# EAGLE board ledRing (EAGLE 5.12)
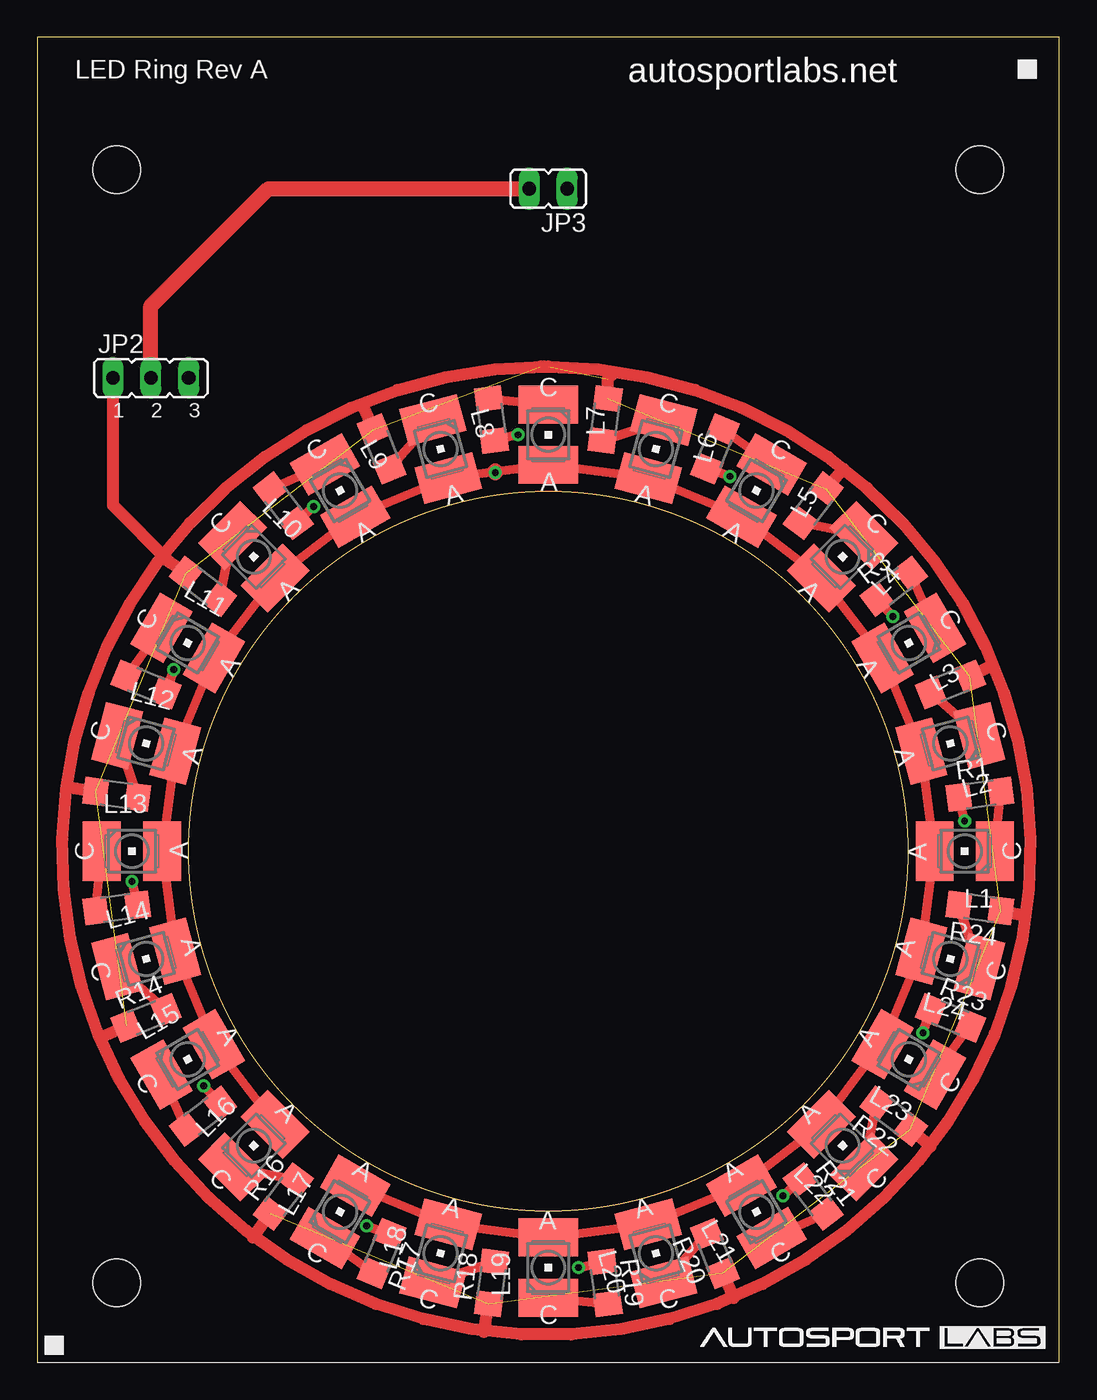
[diagram p0: board, top side]
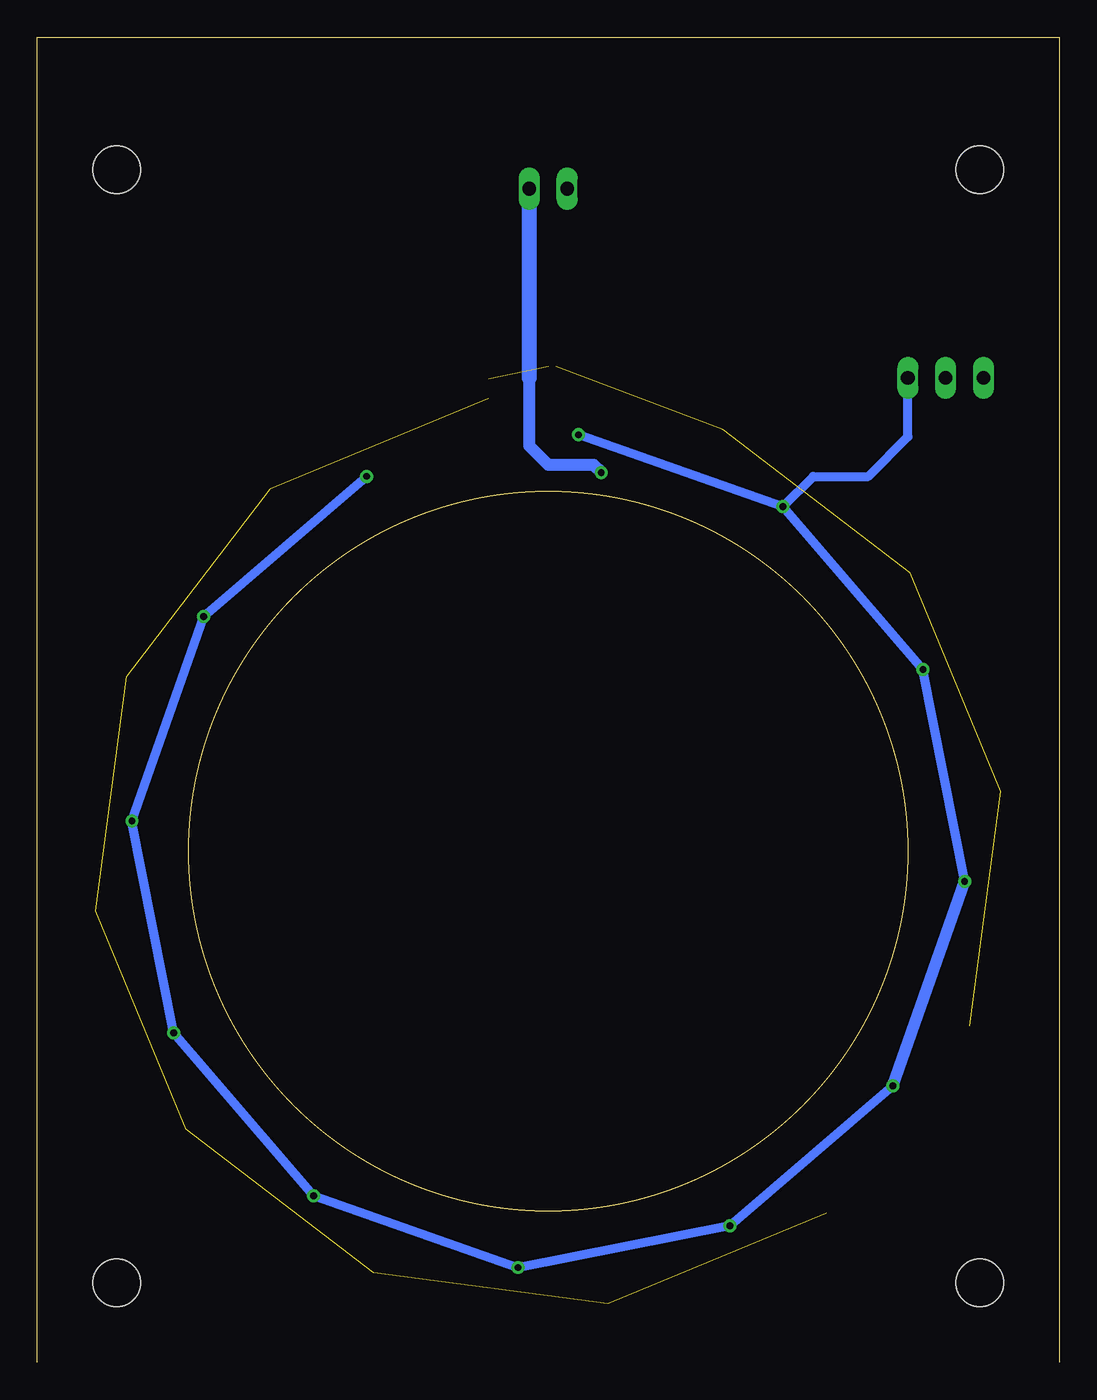
[diagram p1: board, bottom side, seen from below]

Size 68.58 x 88.9 mm. Coordinates in mm from the lower left corner, seen from the top.
Outline: 68.58,0 68.58,88.9 0,88.9 0,0
Outline: circle at 34.29,34.29 radius 24.13
Copper layers (1*16): Top 0.035mm / dielectric 1.5mm / Bottom 0.035mm
Design rules "default *": minimum track width 10mil, minimum drill 16mil, track to track 8mil, track to pad 8mil, pad to pad 8mil, via to via 8mil, smd to smd 8mil, copper to edge 20mil, drill to drill 8mil, minimum pad ring 10mil, minimum via ring 8mil, stop-mask expansion 4mil, vias tented up to drill 24mil, thermal gap 10mil
Holes 3.2 mm at 5.33,5.33 5.33,80.01 63.25,80.01 63.25,5.33

## Footprints (pad centres in the part's own frame; a part is rotated, then mirrored left to right if it is on the bottom)
JP2 = drill 0.914 long: 1 -2.54,0; 2 0,0; 3 2.54,0
JP1 = drill 0.914 long: 1 0,-1.27; 2 0,1.27
P-LCC2-COMPACT = smd 4 x 2.54: A 0,2.02; C 0,-2.02
R1206 = smd 1.6 x 1.803: 1 -1.422,0; 2 1.422,0

## Placement (x,y rotation side)
JP2  [JP2]  7.62,66.04 0 top
JP3  [JP1]  34.29,78.74 90 top
L1  LEDCOMPACT  [P-LCC2-COMPACT]  62.23,34.29 90 top
L2  LEDCOMPACT  [P-LCC2-COMPACT]  61.28,41.52 105 top
L3  LEDCOMPACT  [P-LCC2-COMPACT]  58.49,48.26 120 top
L4  LEDCOMPACT  [P-LCC2-COMPACT]  54.05,54.05 135 top
L5  LEDCOMPACT  [P-LCC2-COMPACT]  48.26,58.49 150 top
L6  LEDCOMPACT  [P-LCC2-COMPACT]  41.52,61.28 165 top
L7  LEDCOMPACT  [P-LCC2-COMPACT]  34.29,62.23 180 top
L8  LEDCOMPACT  [P-LCC2-COMPACT]  27.06,61.28 195 top
L9  LEDCOMPACT  [P-LCC2-COMPACT]  20.32,58.49 210 top
L10  LEDCOMPACT  [P-LCC2-COMPACT]  14.53,54.05 225 top
L11  LEDCOMPACT  [P-LCC2-COMPACT]  10.09,48.26 240 top
L12  LEDCOMPACT  [P-LCC2-COMPACT]  7.3,41.52 255 top
L13  LEDCOMPACT  [P-LCC2-COMPACT]  6.35,34.29 270 top
L14  LEDCOMPACT  [P-LCC2-COMPACT]  7.3,27.06 285 top
L15  LEDCOMPACT  [P-LCC2-COMPACT]  10.09,20.32 300 top
L16  LEDCOMPACT  [P-LCC2-COMPACT]  14.53,14.53 315 top
L17  LEDCOMPACT  [P-LCC2-COMPACT]  20.32,10.09 330 top
L18  LEDCOMPACT  [P-LCC2-COMPACT]  27.06,7.3 345 top
L19  LEDCOMPACT  [P-LCC2-COMPACT]  34.29,6.35 0 top
L20  LEDCOMPACT  [P-LCC2-COMPACT]  41.52,7.3 15 top
L21  LEDCOMPACT  [P-LCC2-COMPACT]  48.26,10.09 30 top
L22  LEDCOMPACT  [P-LCC2-COMPACT]  54.05,14.53 45 top
L23  LEDCOMPACT  [P-LCC2-COMPACT]  58.49,20.32 60 top
L24  LEDCOMPACT  [P-LCC2-COMPACT]  61.28,27.06 75 top
R1  100  [R1206]  63.25,38.1 7.5 top
R2  100  [R1206]  61.28,45.47 202.5 top
R3  100  [R1206]  57.47,52.07 37.5 top
R4  100  [R1206]  52.07,57.47 232.5 top
R5  100  [R1206]  45.47,61.28 67.5 top
R6  100  [R1206]  38.1,63.25 262.5 top
R7  100  [R1206]  30.48,63.25 97.5 top
R8  100  [R1206]  23.11,61.28 292.5 top
R9  100  [R1206]  16.51,57.47 127.5 top
R10  100  [R1206]  11.12,52.07 322.5 top
R11  100  [R1206]  7.3,45.47 157.5 top
R12  100  [R1206]  5.33,38.1 352.5 top
R13  100  [R1206]  5.33,30.48 187.5 top
R14  100  [R1206]  7.3,23.11 22.5 top
R15  100  [R1206]  11.12,16.51 217.5 top
R16  100  [R1206]  16.51,11.12 52.5 top
R17  100  [R1206]  23.11,7.3 247.5 top
R18  100  [R1206]  30.48,5.33 82.5 top
R19  100  [R1206]  38.1,5.33 277.5 top
R20  100  [R1206]  45.47,7.3 112.5 top
R21  100  [R1206]  52.07,11.12 307.5 top
R22  100  [R1206]  57.47,16.51 142.5 top
R23  100  [R1206]  61.28,23.11 337.5 top
R24  100  [R1206]  63.25,30.48 172.5 top

## Library data of the parts
JP2 JP3 = jumper
L1-L24 = LEDs
R1-R24 = rcl

## Nets
+12V: JP3.1 L1.A L2.A L3.A L4.A L5.A L6.A L7.A L8.A L9.A L10.A L11.A L12.A L13.A L14.A L15.A L16.A L17.A L18.A L19.A L20.A L21.A L22.A L23.A L24.A
GND: JP2.2 JP3.2
GREEN: JP2.1 R2.1 R4.1 R6.1 R8.1 R10.1 R12.1 R14.1 R16.1 R18.1 R20.1 R22.1 R24.1
N$1: L1.C R1.2
N$2: L2.C R2.2
N$3: L3.C R3.2
N$4: L4.C R4.2
N$5: L5.C R5.2
N$6: L6.C R6.2
N$7: L7.C R7.2
N$8: L8.C R8.2
N$9: L9.C R9.2
N$10: L10.C R10.2
N$11: L11.C R11.2
N$12: L12.C R12.2
N$13: L14.C R14.2
N$14: L15.C R15.2
N$16: L16.C R16.2
N$17: L17.C R17.2
N$18: L18.C R18.2
N$19: L19.C R19.2
N$20: L20.C R20.2
N$22: L21.C R21.2
N$23: L23.C R23.2
N$24: L24.C R24.2
N$27: L22.C R22.2
N$28: L13.C R13.2
RED: JP2.3 R1.1 R3.1 R5.1 R7.1 R9.1 R11.1 R13.1 R15.1 R17.1 R19.1 R21.1 R23.1

## Tracks (layer width: path | path; a pad name or v marks a point on that pad's centre or on a via)
+12V  (via drill 0.46)
  Top 0.61: L17.A L18.A L19.A L20.A L21.A L22.A 55.88,20.32 L23.A L24.A L1.A L2.A L3.A L4.A L5.A L6.A L7.A 30.66,59.73 L8.A L9.A L10.A L11.A L12.A L13.A L14.A L15.A L16.A
  Top 1.016: v30.73,59.69 30.73,59.8 30.66,59.73
  Bottom 0.813: 35.56,66.04 35.56,61.48 L7.A 31.25,60.21 v30.73,59.69
  Bottom 1.016: 35.56,66.04 JP3.1
GND
  Top 1.016: JP3.2 15.49,78.74 7.62,70.87 JP2.2
GREEN  (12 unrouted)
  Top 0.813: 34.04,66.8 arc360 34.29,66.8 33.78,66.8 | R6.1 38.29,65.97 38.61,66.29 | R8.1 21.84,64.26 | R10.1 8.93,53.65 | 8.93,53.65 8.64,53.85 | JP2.1 5.08,57.5 8.93,53.65 | 2.03,38.61 R12.1 | 4.32,21.84 R14.1 | 14.48,8.38 R16.1 | 29.97,2.03 R18.1 | 46.74,4.32 R20.1 | 59.94,14.48 R22.1 | R24.1 66.29,29.97 | R2.1 64.01,46.74 | R4.1 54.1,59.94
N$1
  Top 0.61: L1.C R1.2
N$2
  Top 0.61: L2.C R2.2
N$3
  Top 0.61: L3.C R3.2
N$4
  Top 0.61: L4.C R4.2
N$5
  Top 0.61: L5.C R5.2
N$6
  Top 0.61: R6.2 L6.C
N$7
  Top 0.61: R7.2 L7.C
N$8
  Top 0.61: R8.2 L8.C
N$9
  Top 0.61: R9.2 L9.C
N$10
  Top 0.61: R10.2 L10.C
N$11
  Top 0.61: R11.2 L11.C
N$12
  Top 0.61: R12.2 L12.C
N$13
  Top 0.61: L14.C R14.2
N$14
  Top 0.61: R15.2 L15.C
N$16
  Top 0.61: L16.C R16.2
N$17
  Top 0.61: L17.C R17.2
N$18
  Top 0.61: L18.C R18.2
N$19
  Top 0.61: L19.C R19.2
N$20
  Top 0.61: L20.C R20.2
N$22
  Top 0.61: L21.C R21.2
N$23
  Top 0.61: L23.C R23.2
N$24
  Top 0.61: L24.C R24.2
N$27
  Top 0.61: L22.C R22.2
N$28
  Top 0.61: R13.2 L13.C
RED  (via drill 0.46)
  Top 0.61: v18.54,57.4 R9.1 | v9.14,46.48 R11.1 | v32.26,62.23 R7.1 | v46.48,59.44 R5.1 | v57.4,50.04 R3.1 | v62.23,36.32 R1.1 | v59.44,22.1 R23.1 | v50.04,11.18 R21.1 | v36.32,6.35 R19.1 | v22.1,9.14 R17.1 | R15.1 v11.18,18.54 | v6.35,32.26 R13.1
  Bottom 0.61: v18.54,57.4 v9.14,46.48 v6.35,32.26 | v11.18,18.54 v22.1,9.14 v36.32,6.35 v50.04,11.18 v59.44,22.1 v62.23,36.32 v57.4,50.04 v46.48,59.44 | v18.54,57.4 v32.26,62.23 | JP2.3 10.16,62.1 12.83,59.44 16.51,59.44 v18.54,57.4
  Bottom 0.813: v11.18,18.54 v6.35,32.26

## Text on the board
tPlace: LED Ring Rev A | autosportlabs.net